# EAGLE board open-bldc-fets-one-side (EAGLE 5.03)
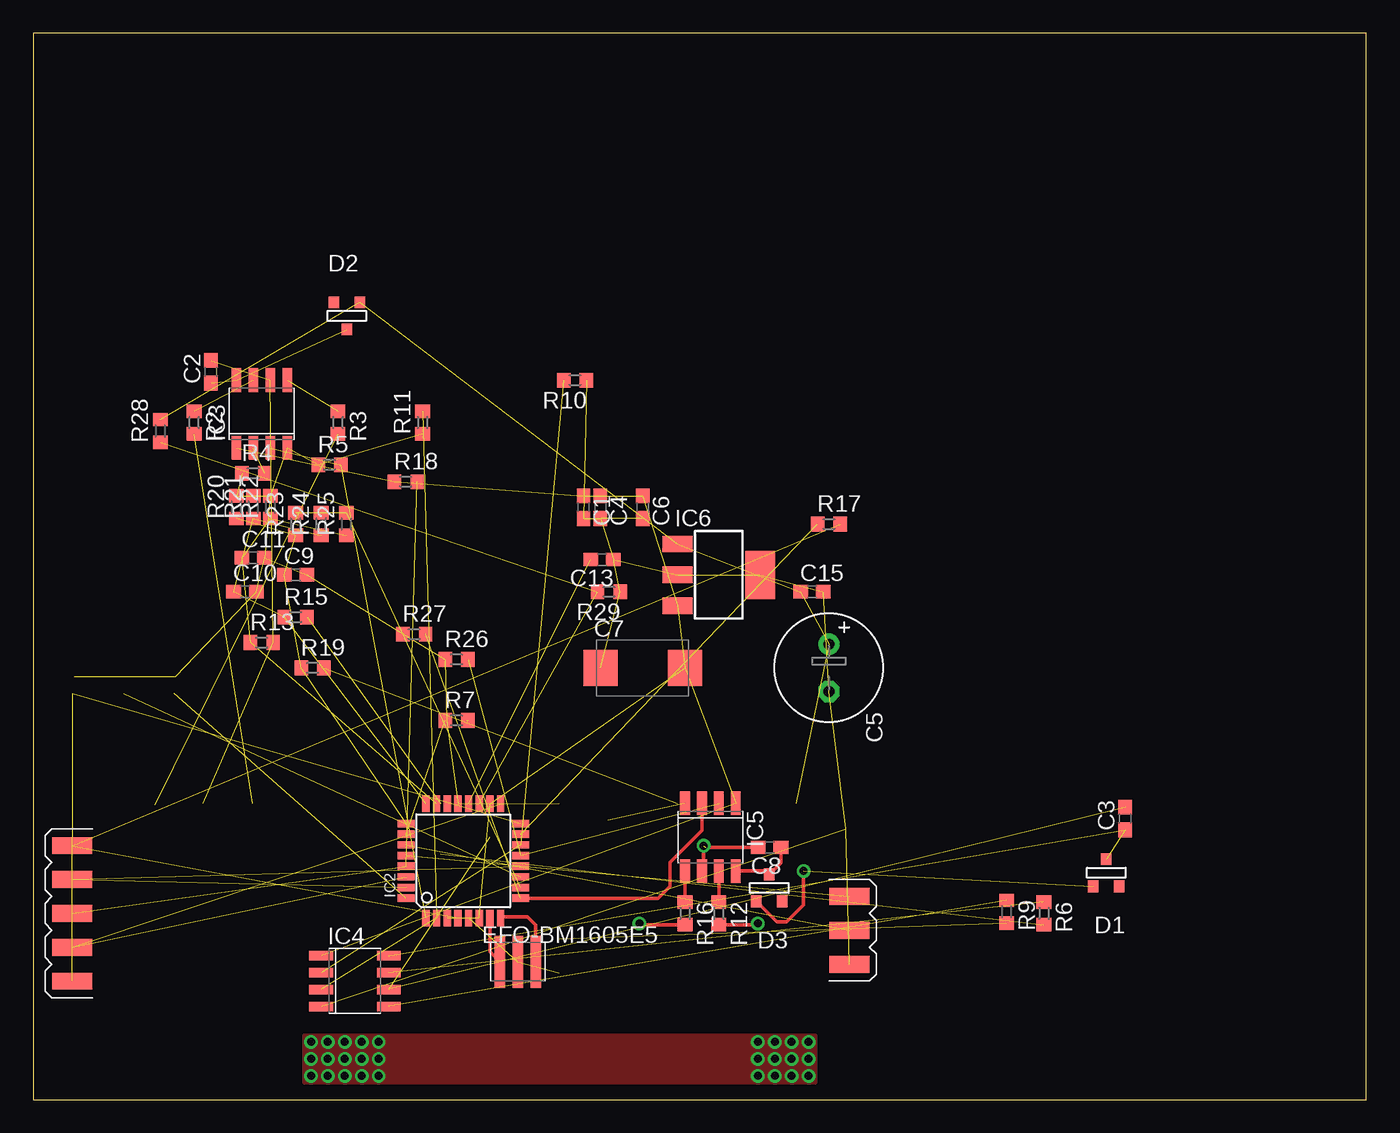
[diagram p0: board, top side]
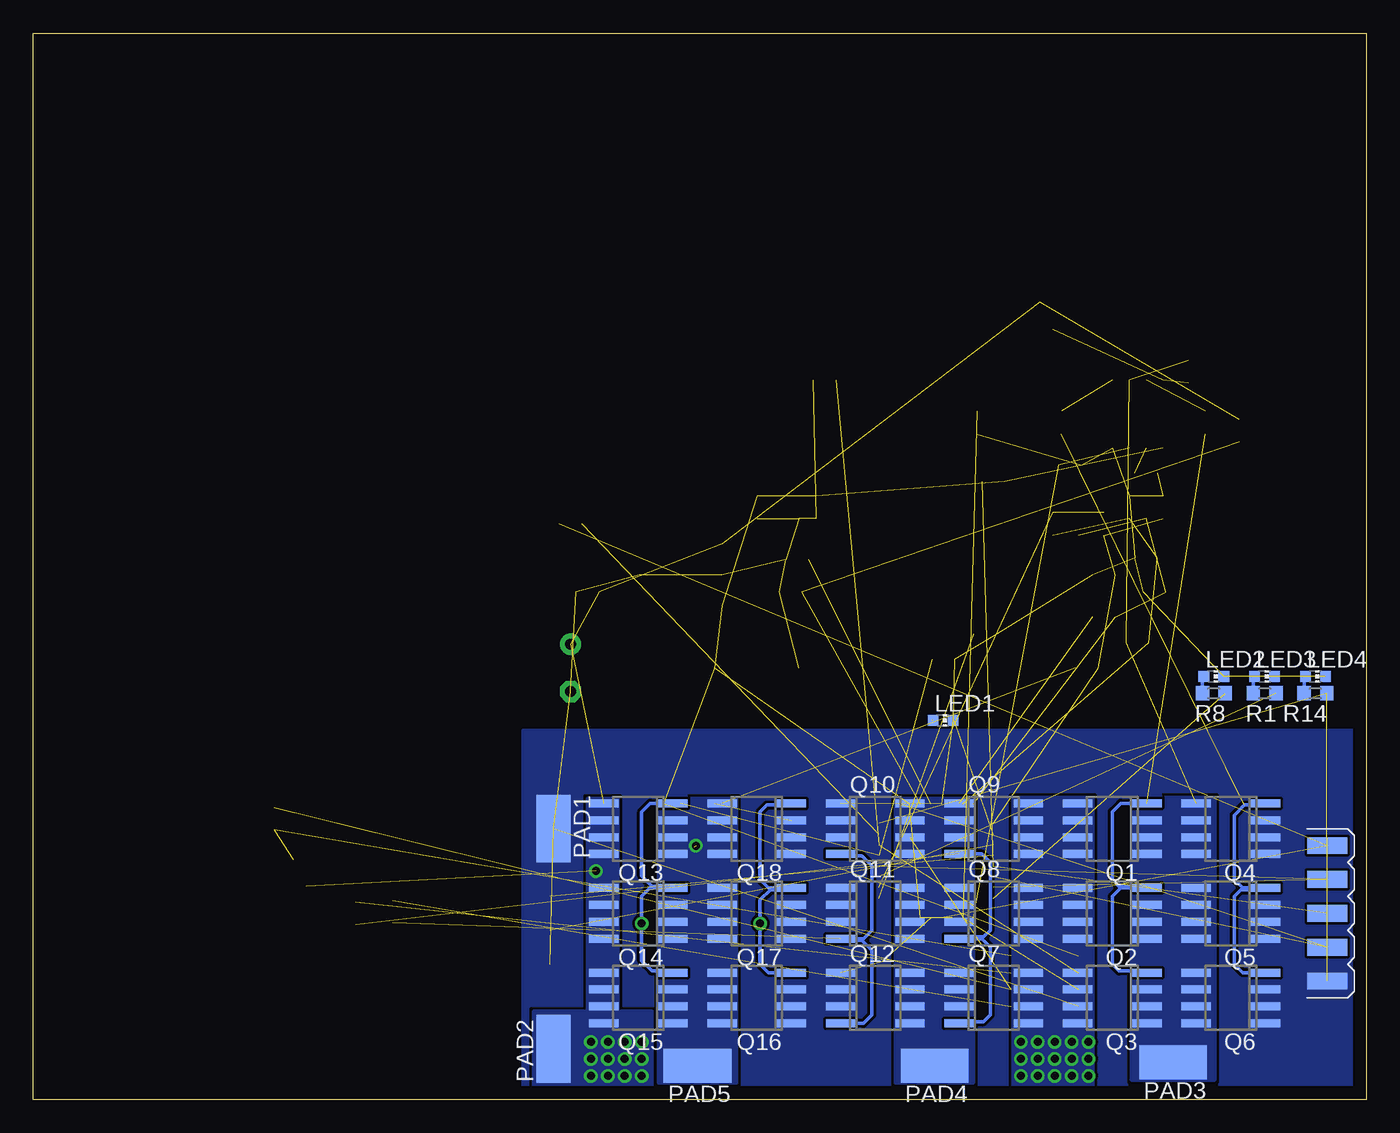
[diagram p1: board, bottom side, seen from below]

Size 100 x 80 mm. Coordinates in mm from the lower left corner, seen from the top.
Outline: 0,0 100,0 100,80 0,80 0,0
Copper layers (1*16): Top 0.035mm / dielectric 1.5mm / Bottom 0.035mm
Design rules "default": minimum track width 10mil, minimum drill 24mil, track to track 8mil, track to pad 8mil, pad to pad 8mil, via to via 8mil, smd to smd 8mil, copper to edge 40mil, drill to drill 8mil, minimum pad ring 10mil, minimum via ring 8mil, stop-mask expansion 4mil, vias tented up to drill 0mil, thermal gap 10mil
Net classes: 0 default: width 0.152 mm, drill 0.305 mm, clearance 0.152 mm

## Footprints (pad centres in the part's own frame; a part is rotated, then mirrored left to right if it is on the bottom)
C0603 = smd 1.1 x 1: 1 -0.85,0; 2 0.85,0
E3,5-8 = drill 0.813 pad 1.6 round: + -1.778,0 | drill 0.813 pad 1.6 octagon: - 1.778,0
D/7343-31R = smd 2.55 x 2.7: + 3.175,0; - -3.175,0
SOT-23 = smd 0.787 x 0.889: 1 0.025,-1.016; 2 -0.94,1.016; 3 0.991,1.016
EFOBM = smd 0.8 x 3.9: 1 0.7,1.45; 2 2.05,1.45; 3 3.4,1.45
TQFP32-08 = smd 1.27 x 0.559: 1 -4.293,2.8; 2 -4.293,2; 3 -4.293,1.2; 4 -4.293,0.4; 5 -4.293,-0.4; 6 -4.293,-1.2; 7 -4.293,-2; 8 -4.293,-2.8; 17 4.293,-2.8; 18 4.293,-2; 19 4.293,-1.2; 20 4.293,-0.4; 21 4.293,0.4; 22 4.293,1.2; 23 4.293,2; 24 4.293,2.8 | smd 0.559 x 1.27: 9 -2.8,-4.293; 10 -2,-4.293; 11 -1.2,-4.293; 12 -0.4,-4.293; 13 0.4,-4.293; 14 1.2,-4.293; 15 2,-4.293; 16 2.8,-4.293; 25 2.8,4.293; 26 2,4.293; 27 1.2,4.293; 28 0.4,4.293; 29 -0.4,4.293; 30 -1.2,4.293; 31 -2,4.293; 32 -2.8,4.293
SO-8 = smd 0.72 x 1.78: 1 -1.905,-2.543; 2 -0.635,-2.543; 3 0.635,-2.543; 4 1.905,-2.543; 5 1.905,2.543; 6 0.635,2.543; 7 -0.635,2.543; 8 -1.905,2.543
SOT223 = smd 1.219 x 2.235: 1 -2.311,-3.099; 2 0,-3.099; 3 2.311,-3.099 | smd 3.6 x 2.2: 4 0,3.099
CHIP-LED0603 = smd 0.8 x 0.8: A 0,-0.75; C 0,0.75
SMD2,54-5,08 = smd 2.54 x 5.08: 1 0,0
SO-08 = smd 0.6 x 2.2: 1 -1.905,-2.6; 2 -0.635,-2.6; 3 0.635,-2.6; 4 1.905,-2.6; 5 1.905,2.6; 6 0.635,2.6; 7 -0.635,2.6; 8 -1.905,2.6
R0603 = smd 1 x 1.1: 1 -0.85,0; 2 0.85,0
SMD03-1 = smd 1.27 x 3: 1 1.27,1.524; 2 3.81,1.524; 3 6.35,1.524
SMD05-2 = smd 1.27 x 3 bottom: 1 1.27,1.524; 3 3.81,1.524; 5 6.35,1.524; 7 8.89,1.524; 9 11.43,1.524 | smd 1.27 x 3: 2 1.27,1.524; 4 3.81,1.524; 6 6.35,1.524; 8 8.89,1.524; 10 11.43,1.524

## Placement (x,y rotation side)
C1  100nF  [C0603]  41.27,44.45 270 top
C2  100n  [C0603]  13.34,54.61 90 top
C3  100n  [C0603]  81.92,21.08 90 top
C4  100nF  [C0603]  42.55,44.45 270 top
C5  330µ  [E3,5-8]  59.69,32.38 270 top
C6  100nF  [C0603]  45.72,44.45 270 top
C7  10µ  [D/7343-31R]  45.72,32.38 0 top
C8  100n  [C0603]  55.24,18.92 180 top
C9  100n  [C0603]  19.68,39.37 0 top
C10  100n  [C0603]  15.88,38.1 0 top
C11  100n  [C0603]  16.51,40.64 0 top
C13  100nF  [C0603]  42.67,40.51 180 top
C15  100n  [C0603]  58.42,38.1 0 top
D1  BAS21  [SOT-23]  80.52,17.02 180 top
D2  BAS21  [SOT-23]  23.5,58.8 0 top
D3  BAS21  [SOT-23]  55.24,15.88 180 top
EFO-BM1605E5  16MHz  [EFOBM]  34.29,8.89 0 top
IC2  MEGA8-AI  [TQFP32-08]  32.26,17.91 90 top
IC3  IR2101  [SO-8]  17.14,51.44 0 top
IC4  IR2101  [SO-8]  24.13,8.89 270 top
IC5  IR2101  [SO-8]  50.8,19.68 180 top
IC6  576-1173-ND  [SOT223]  51.44,39.37 270 top
LED1  GREEN  [CHIP-LED0603]  31.75,28.45 270 bottom
LED2  AMBER  [CHIP-LED0603]  11.43,31.75 270 bottom
LED3  AMBER  [CHIP-LED0603]  7.62,31.75 270 bottom
LED4  AMBER  [CHIP-LED0603]  3.81,31.75 270 bottom
PAD1  BATT-  [SMD2,54-5,08]  60.96,20.32 180 bottom
PAD2  BATT+  [SMD2,54-5,08]  60.96,3.81 0 bottom
PAD3  PHASE_A  [SMD2,54-5,08]  14.48,2.79 90 bottom
PAD4  PHASE_B  [SMD2,54-5,08]  32.38,2.54 90 bottom
PAD5  PHASE_C  [SMD2,54-5,08]  50.16,2.54 90 bottom
Q1  IRF7831  [SO-08]  19.05,20.32 90 bottom
Q2  IRF7831  [SO-08]  19.05,13.97 90 bottom
Q3  IRF7831  [SO-08]  19.05,7.62 90 bottom
Q4  IRF7831  [SO-08]  10.16,20.32 90 bottom
Q5  IRF7831  [SO-08]  10.16,13.97 90 bottom
Q6  IRF7831  [SO-08]  10.16,7.62 90 bottom
Q7  IRF7831  [SO-08]  27.94,7.62 270 bottom
Q8  IRF7831  [SO-08]  27.94,13.97 270 bottom
Q9  IRF7831  [SO-08]  27.94,20.32 270 bottom
Q10  IRF7831  [SO-08]  36.83,20.32 270 bottom
Q11  IRF7831  [SO-08]  36.83,13.97 270 bottom
Q12  IRF7831  [SO-08]  36.83,7.62 270 bottom
Q13  IRF7831  [SO-08]  54.61,20.32 90 bottom
Q14  IRF7831  [SO-08]  54.61,13.97 90 bottom
Q15  IRF7831  [SO-08]  54.61,7.62 90 bottom
Q16  IRF7831  [SO-08]  45.72,7.62 90 bottom
Q17  IRF7831  [SO-08]  45.72,13.97 90 bottom
Q18  IRF7831  [SO-08]  45.72,20.32 90 bottom
R1  1k  [R0603]  7.62,30.48 180 bottom
R2  22  [R0603]  12.06,50.8 270 top
R3  22  [R0603]  22.86,50.8 270 top
R4  270R  [R0603]  16.51,46.99 0 top
R5  270R  [R0603]  22.23,47.62 0 top
R6  22  [R0603]  75.82,13.97 270 top
R7  1k  [R0603]  31.75,28.45 0 top
R8  1k  [R0603]  11.43,30.48 180 bottom
R9  22  [R0603]  73.03,14.1 270 top
R10  270R  [R0603]  40.64,53.98 180 top
R11  270R  [R0603]  29.21,50.8 90 top
R12  22  [R0603]  51.44,13.97 270 top
R13  47k  [R0603]  17.14,34.29 0 top
R14  1k  [R0603]  3.81,30.48 180 bottom
R15  47k  [R0603]  19.68,36.2 0 top
R16  22  [R0603]  48.9,13.97 270 top
R17  4k7  [R0603]  59.69,43.18 0 top
R18  10k  [R0603]  27.94,46.35 0 top
R19  47k  [R0603]  20.95,32.38 0 top
R20  10k  [R0603]  15.24,44.45 90 top
R21  10k  [R0603]  16.51,44.45 90 top
R22  10k  [R0603]  17.78,44.45 90 top
R23  47k  [R0603]  19.68,43.18 90 top
R24  47k  [R0603]  21.59,43.18 90 top
R25  47k  [R0603]  23.5,43.18 90 top
R26  270R  [R0603]  31.75,33.02 0 top
R27  270R  [R0603]  28.57,34.92 0 top
R28  10k  [R0603]  9.53,50.16 90 top
R29  1k  [R0603]  43.18,38.1 180 top
U$1  SMD03-1  [SMD03-1]  59.69,16.51 270 top
U$5  SMD05-2  [SMD05-2]  4.45,7.62 90 top

## Library data of the parts
C1-C11 C13 C15 R1-R29 = rcl
D1-D3 = zetex
EFO-BM1605E5 IC3-IC5 = open-bldc
IC2 = atmel
IC6 = linear-technology
LED1-LED4 = led
PAD1-PAD5 = wirepad
Q1-Q18 = my-transistor-power
U$1 U$5 = patrick

## Nets
+5V: C1.1 C4.1 C6.1 C7.+ IC2.4 IC2.6 IC2.18 IC3.1 IC4.1 IC5.1 IC6.3 R18.1 U$5.9
+12V: C5.+ C15.1 D1.3 D2.3 D3.3 IC6.1 PAD2.1 Q1.5 Q1.6 Q1.7 Q1.8 Q2.5 Q2.6 Q2.7 Q2.8 Q3.5 Q3.6 Q3.7 Q3.8 Q7.5 Q7.6 Q7.7 Q7.8 Q8.5 Q8.6 Q8.7 Q8.8 Q9.5 Q9.6 Q9.7 Q9.8 Q13.5 Q13.6 Q13.7 Q13.8 Q14.5 Q14.6 Q14.7 Q14.8 Q15.5 Q15.6 Q15.7 Q15.8 R28.2
BEMF_A: C11.1 IC2.23 R13.1 R22.1 R25.1
BEMF_B: C10.1 IC2.24 R15.1 R21.1 R24.1
BEMF_C: C9.1 IC2.25 R19.1 R20.1 R23.1
CTRL_A+: IC3.2 R4.2
CTRL_A+/MOSI: IC2.15 R17.1
CTRL_A-: IC2.1 IC3.3 R5.2
CTRL_B+: IC2.14 IC4.2 R10.2
CTRL_B-: IC2.2 IC4.3 R11.2
CTRL_C+: IC2.13 IC5.2 R26.2
CTRL_C-: IC2.9 IC5.3 R27.2
GND: C1.2 C4.2 C5.- C6.2 C7.- C9.2 C10.2 C11.2 C13.1 C15.2 EFO-BM1605E5.2 IC2.3 IC2.5 IC2.21 IC3.4 IC4.4 IC5.4 IC6.2 IC6.4 LED1.C LED2.C LED3.C LED4.C PAD1.1 Q4.1 Q4.2 Q4.3 Q5.1 Q5.2 Q5.3 Q6.1 Q6.2 Q6.3 Q10.1 Q10.2 Q10.3 Q11.1 Q11.2 Q11.3 Q12.1 Q12.2 Q12.3 Q16.1 Q16.2 Q16.3 Q17.1 Q17.2 Q17.3 Q18.1 Q18.2 Q18.3 R4.1 R5.1 R10.1 R11.1 R20.2 R21.2 R22.2 R26.1 R27.1 R29.1 U$1.3 U$5.1
LED1: IC2.26 R7.1
LED2: IC2.32 R8.1
LED3: IC2.11 R1.1
MIDDLE: IC2.10 R23.2 R24.2 R25.2
MISO/LED4: IC2.16 R14.1 U$5.2
MOSI: R17.2 U$5.10
N$1: IC4.7 R6.1
N$2: IC3.7 R2.1
N$3: LED1.A R7.2
N$4: LED2.A R8.2
N$5: LED3.A R1.2
N$6: C13.2 IC2.20
N$7: IC3.5 R3.1
N$8: EFO-BM1605E5.1 IC2.7
N$9: EFO-BM1605E5.3 IC2.8
N$10: LED4.A R14.2
N$11: Q1.4 Q2.4 Q3.4 R2.2
N$12: C2.1 D2.1 IC3.8
N$13: IC4.5 R9.1
N$14: Q7.4 Q8.4 Q9.4 R6.2
N$15: Q4.4 Q5.4 Q6.4 R3.2
N$16: C3.1 D1.1 IC4.8
N$17: Q10.4 Q11.4 Q12.4 R9.2
N$18: IC5.7 R12.1
N$19: IC5.5 R16.1
N$20: Q13.4 Q14.4 Q15.4 R12.2
N$21: C8.1 D3.1 IC5.8
N$22: Q16.4 Q17.4 Q18.4 R16.2
PHASE_A: C2.2 IC3.6 PAD3.1 Q1.1 Q1.2 Q1.3 Q2.1 Q2.2 Q2.3 Q3.1 Q3.2 Q3.3 Q4.5 Q4.6 Q4.7 Q4.8 Q5.5 Q5.6 Q5.7 Q5.8 Q6.5 Q6.6 Q6.7 Q6.8 R13.2
PHASE_B: C3.2 IC4.6 PAD4.1 Q7.1 Q7.2 Q7.3 Q8.1 Q8.2 Q8.3 Q9.1 Q9.2 Q9.3 Q10.5 Q10.6 Q10.7 Q10.8 Q11.5 Q11.6 Q11.7 Q11.8 Q12.5 Q12.6 Q12.7 Q12.8 R15.2
PHASE_C: C8.2 IC5.6 PAD5.1 Q13.1 Q13.2 Q13.3 Q14.1 Q14.2 Q14.3 Q15.1 Q15.2 Q15.3 Q16.5 Q16.6 Q16.7 Q16.8 Q17.5 Q17.6 Q17.7 Q17.8 Q18.5 Q18.6 Q18.7 Q18.8 R19.2
PPM: IC2.12 U$5.7
RESET: IC2.29 R18.2 U$5.6
RXD: IC2.30 U$5.3
SCK: IC2.17 U$5.4
SCL: IC2.28 U$1.1
SDA: IC2.27 U$1.2
TXD: IC2.31 U$5.8
V_BAT: IC2.19 R28.1 R29.2

## Tracks (layer width: path | path; a pad name or v marks a point on that pad's centre or on a via)
+5V  (12 unrouted)
+12V  (via drill 0.6)  (6 unrouted)
  Top 0.254: D3.3 55.78,13.34 56.52,13.34 57.78,14.61 v57.78,17.14
  other vias: 58.17,4.32 58.17,3.05 58.17,1.78 56.9,4.32 55.63,4.32 54.36,4.32 56.9,3.05 55.63,3.05 54.36,3.05 56.9,1.78 55.63,1.78 54.36,1.78 20.83,1.78 22.1,1.78 23.37,1.78 24.64,1.78 25.91,1.78 20.83,3.05 22.1,3.05 23.37,3.05 24.64,3.05 25.91,3.05 20.83,4.32 22.1,4.32 23.37,4.32 24.64,4.32 25.91,4.32
  pour Bottom (no thermals): 20.57,22.61 26.42,22.61 26.42,1.02 20.57,1.02
  pour Bottom (no thermals): 56.13,22.61 58.42,22.61 58.42,5.33 56.13,5.33
  pour Bottom (no thermals): 62.48,6.6 53.59,6.6 53.59,1.02 62.48,1.02
  pour Top: 58.67,4.83 58.67,1.27 20.32,1.27 20.32,4.83
BEMF_A  (4 unrouted)
BEMF_B  (4 unrouted)
BEMF_C  (4 unrouted)
CTRL_A+  (1 unrouted)
CTRL_A+/MOSI  (1 unrouted)
CTRL_A-  (2 unrouted)
CTRL_B+  (2 unrouted)
CTRL_B-  (2 unrouted)
CTRL_C+  (2 unrouted)
CTRL_C-  (1 unrouted)
  Top 0.254: 50.16,21.46 IC5.3 50.16,20.19 47.75,17.78 47.75,16 46.86,15.11 IC2.9
GND  (34 unrouted)
  pour Bottom (rank 2, no thermals): 0,27.69 63.25,27.69 63.25,0.25 0,0.25
LED1  (1 unrouted)
LED2  (1 unrouted)
LED3  (1 unrouted)
MIDDLE  (3 unrouted)
MISO/LED4  (2 unrouted)
MOSI  (1 unrouted)
N$1  (1 unrouted)
N$2  (1 unrouted)
N$3  (1 unrouted)
N$4
  Bottom 0.254: R8.2 12.28,31.65 LED2.A
N$5
  Bottom 0.254: R1.2 8.47,31.65 LED3.A
N$6  (1 unrouted)
N$7  (1 unrouted)
N$8
  Top 0.254: EFO-BM1605E5.1 34.26,11.07 IC2.7
N$9
  Top 0.254: EFO-BM1605E5.3 37.69,13.11 37.08,13.72 35.16,13.72 IC2.8
N$10
  Bottom 0.254: R14.2 4.66,31.65 LED4.A
N$11  (1 unrouted)
  Bottom 0.254: Q1.4 18.41,22.23 19.05,21.59 19.05,16.51 18.54,16 16.58,16 Q2.4 18.41,15.88 19.05,15.24 19.05,10.16 18.54,9.65 16.58,9.65 Q3.4
N$12  (2 unrouted)
N$13  (1 unrouted)
N$14  (1 unrouted)
  Bottom 0.254: Q9.4 28.83,18.41 28.19,17.78 28.19,12.7 28.7,12.19 30.41,12.19 Q8.4 28.83,12.06 28.19,11.43 28.19,6.35 28.7,5.84 30.41,5.84 Q7.4
N$15  (1 unrouted)
  Bottom 0.254: Q6.4 9.27,9.53 9.91,10.16 9.91,15.24 9.4,15.75 7.69,15.75 Q5.4 9.27,15.88 9.91,16.51 9.91,21.34 9.14,22.1 7.69,22.1 Q4.4
N$16  (2 unrouted)
N$17  (1 unrouted)
  Bottom 0.254: Q12.4 37.72,5.71 37.08,6.35 37.08,11.18 37.85,11.94 39.3,11.94 Q11.4 37.72,12.06 37.08,12.7 37.08,17.53 37.85,18.29 39.3,18.29 Q10.4
N$18
  Top 0.254: R12.1 IC5.7
N$19
  Top 0.254: R16.1 IC5.5
N$20  (via drill 0.6)
  Top 0.254: R12.2 54.27,13.12 v54.36,13.21
  Bottom 0.254: Q13.4 53.72,22.23 54.36,21.59 54.36,16.76 53.59,16 52.14,16 Q14.4 53.72,15.88 54.36,15.24 v54.36,13.21 54.36,10.41 53.59,9.65 52.14,9.65 Q15.4
N$21
  Top 0.254: IC5.8 54.97,17.14 D3.1 56.09,17.77 C8.1
N$22  (via drill 0.6)
  Top 0.254: R16.2 45.55,13.12 v45.47,13.21
  Bottom 0.254: Q16.4 44.83,9.53 45.47,10.16 v45.47,13.21 45.47,14.99 44.7,15.75 43.25,15.75 Q17.4 44.83,15.88 45.47,16.51 45.47,21.59 44.96,22.1 43.25,22.1 Q18.4
PHASE_A  (3 unrouted)
  pour Bottom (no thermals): 11.43,1.52 11.43,22.61 17.53,22.61 17.53,1.52
PHASE_B  (3 unrouted)
  pour Bottom (no thermals): 29.46,22.61 35.31,22.61 35.31,1.27 29.46,1.27
PHASE_C  (via drill 0.6)  (2 unrouted)
  Top 0.254: C8.2 50.42,18.92 50.29,18.8 50.29,17.27 IC5.6
  other vias: 50.29,19.05
  pour Bottom (no thermals): 47.24,22.61 53.09,22.61 53.09,1.27 47.24,1.27
PPM  (1 unrouted)
RESET  (2 unrouted)
RXD  (1 unrouted)
SCK  (1 unrouted)
SCL  (1 unrouted)
SDA  (1 unrouted)
TXD  (1 unrouted)
V_BAT  (2 unrouted)